# Altium PCB Crystal_Test_V1.PcbDoc
Units mm, origin at the board's own origin, x right, y up, seen from the top; angles counter-clockwise.
Board outline 40.4 x 45.06 mm, 2 copper layers (Top Layer, Bottom Layer), stack 0.695 mm thick; 20 components, 13 nets, 63 pads, 351 vias.
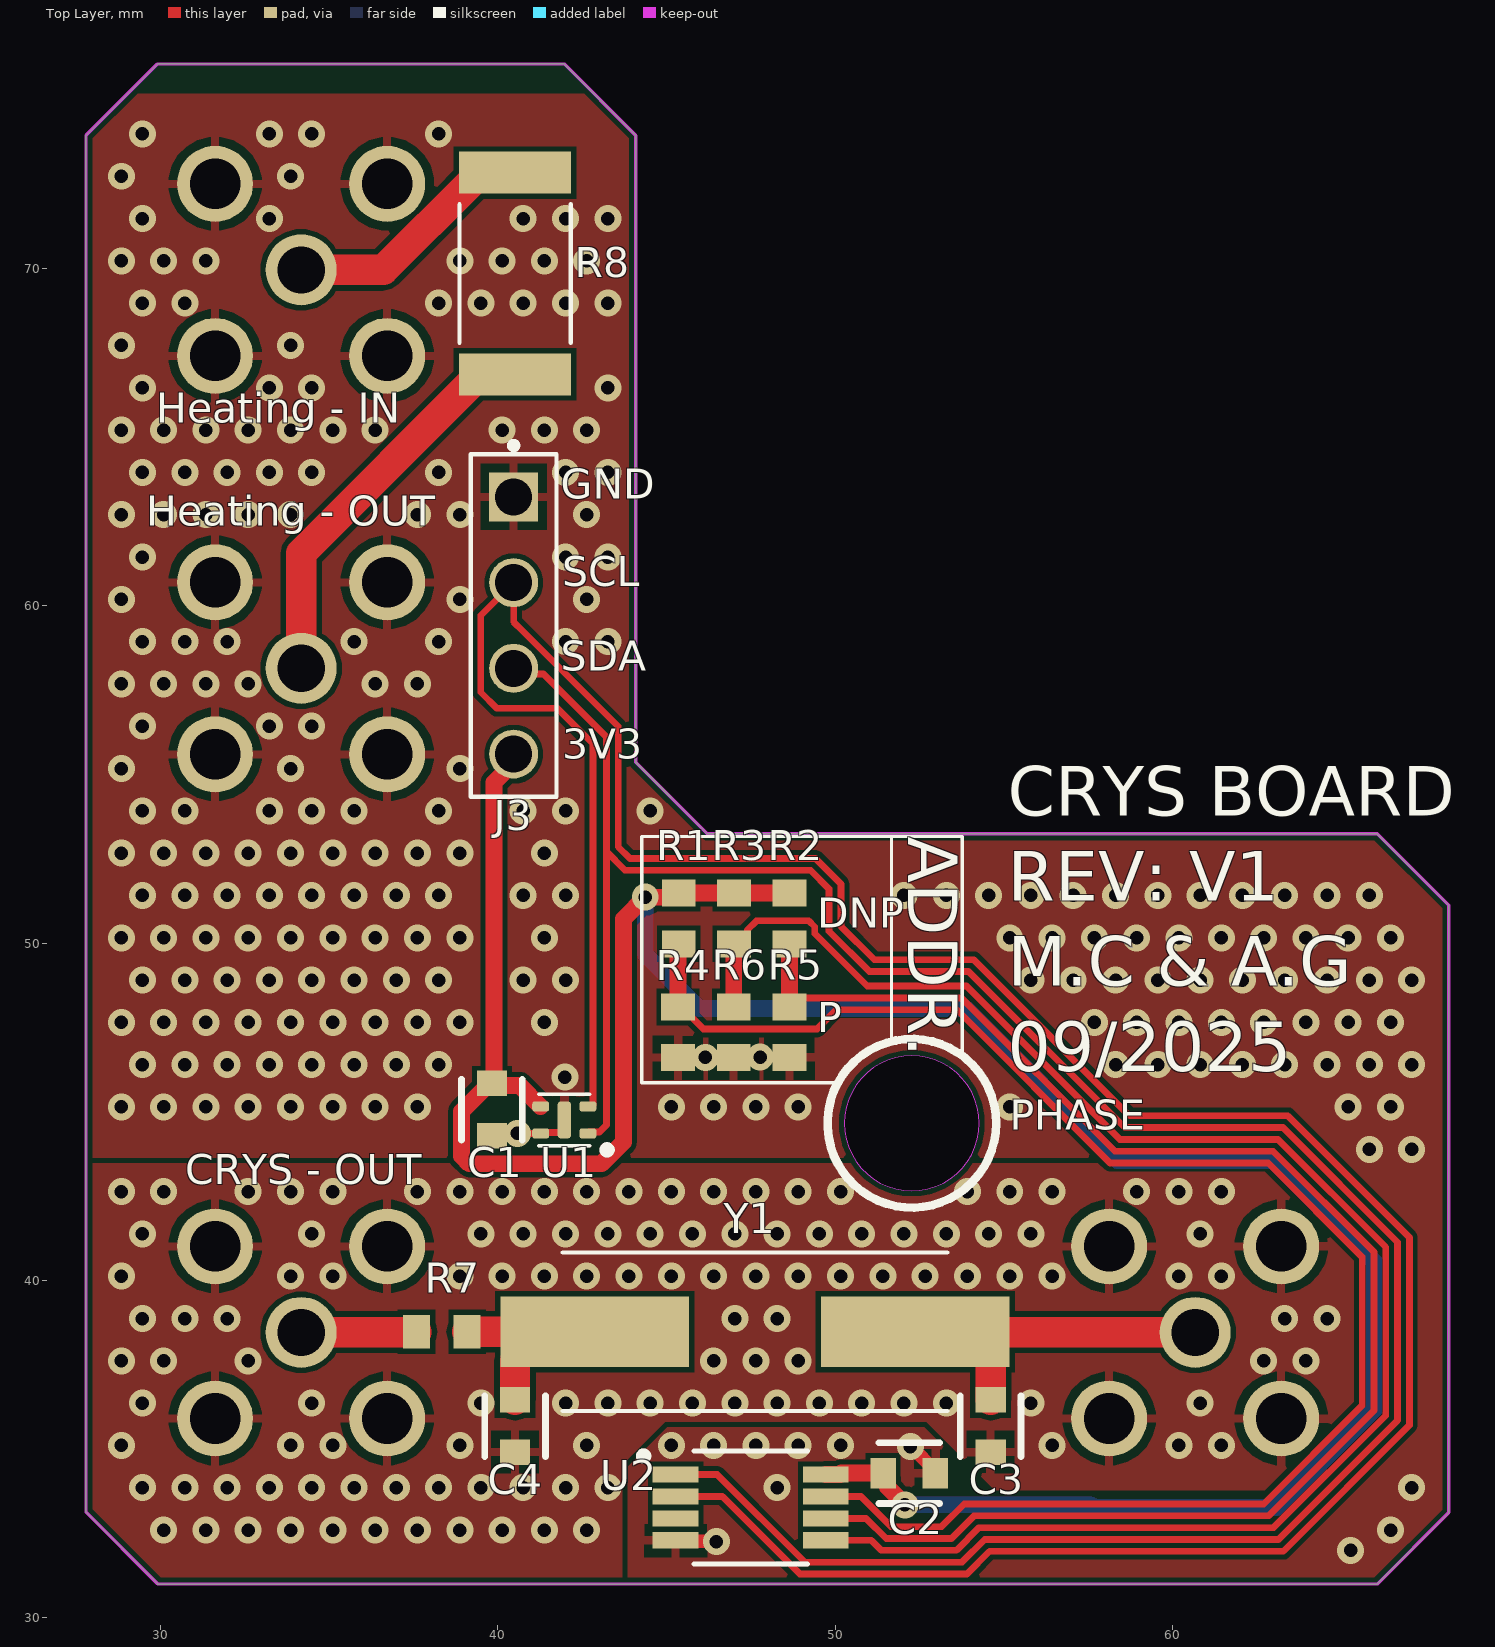
[diagram p0: Top Layer view]
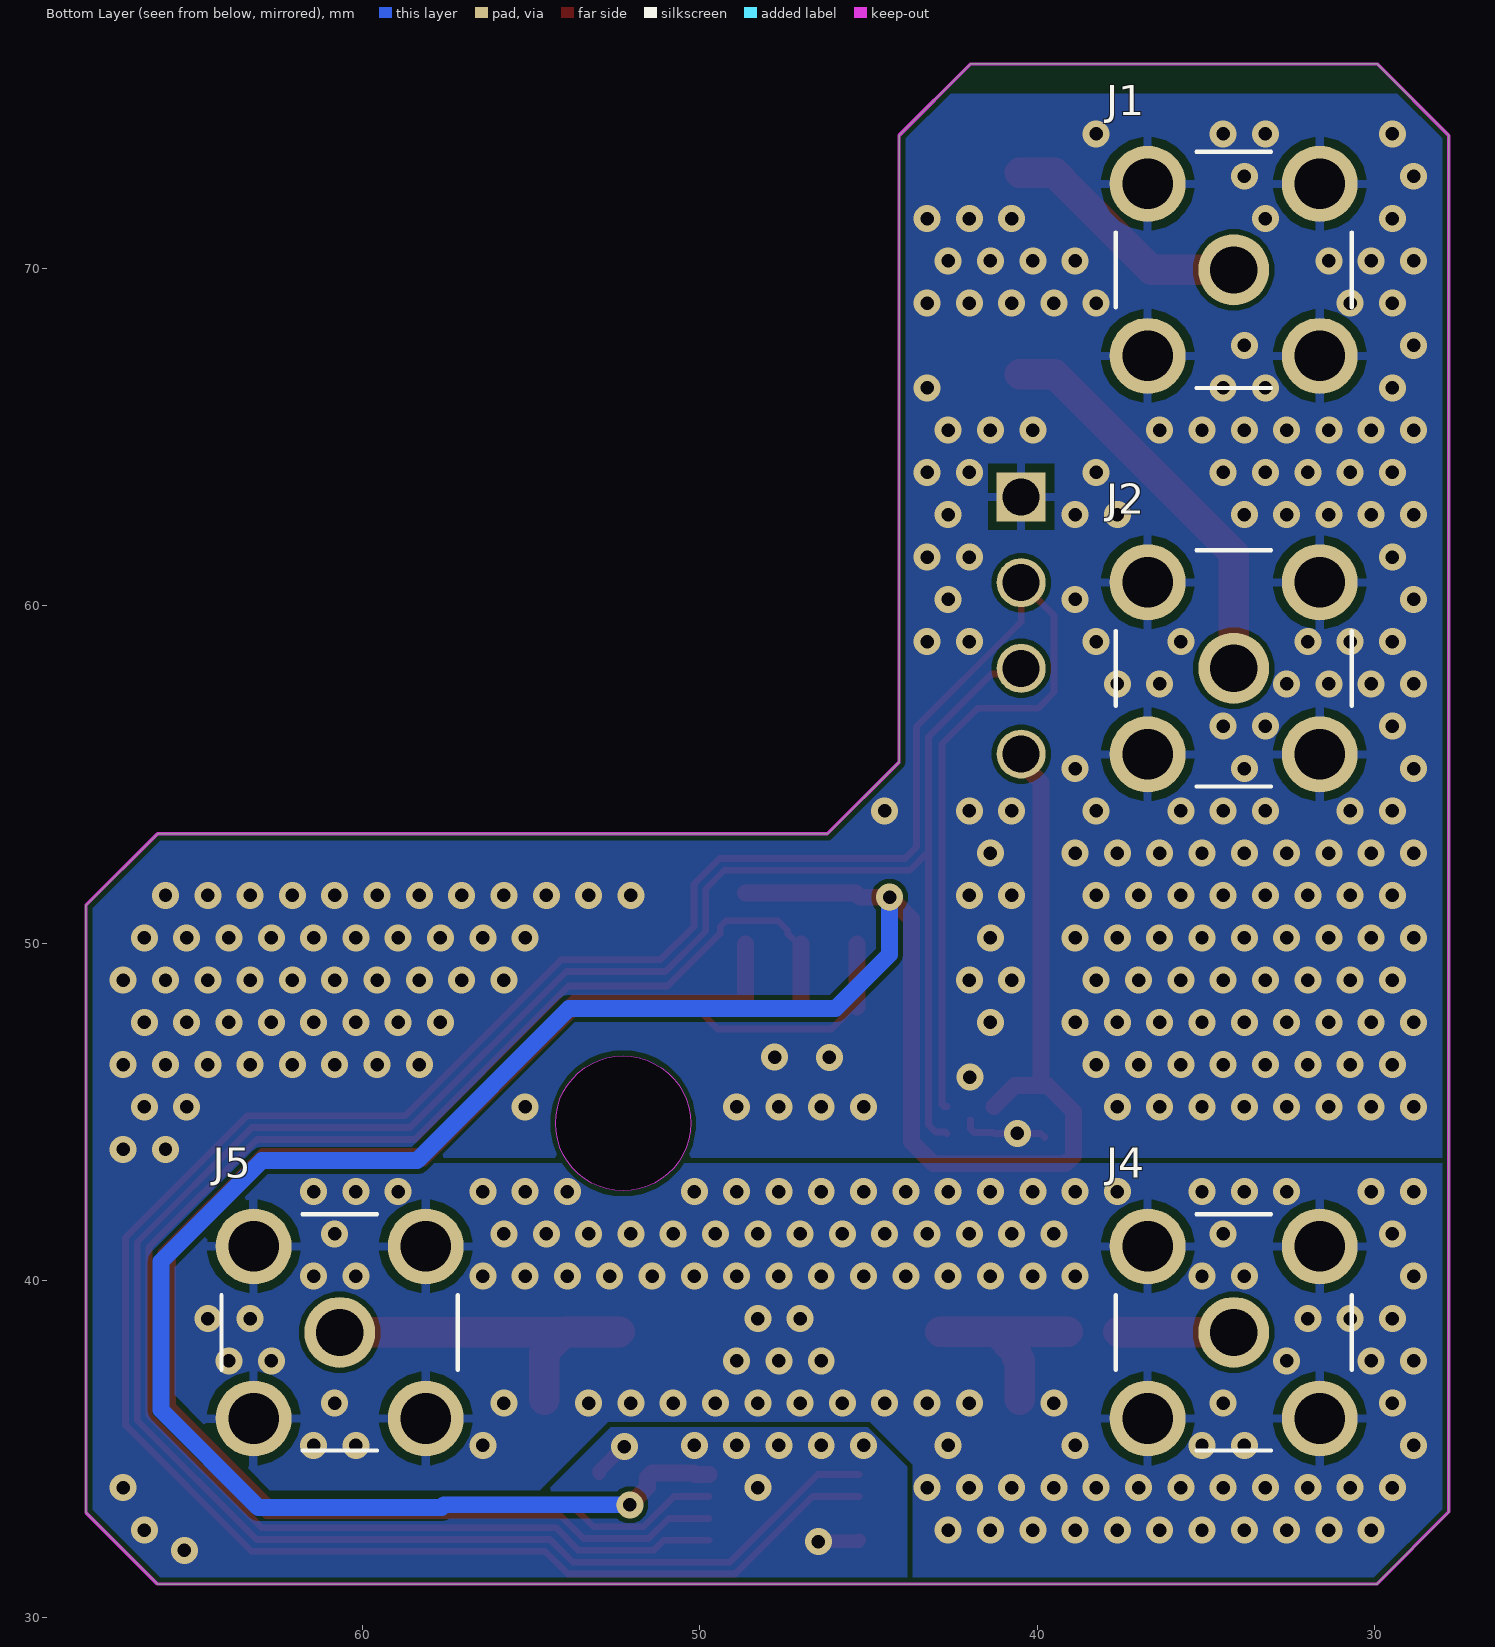
[diagram p1: Bottom Layer view, seen from below]
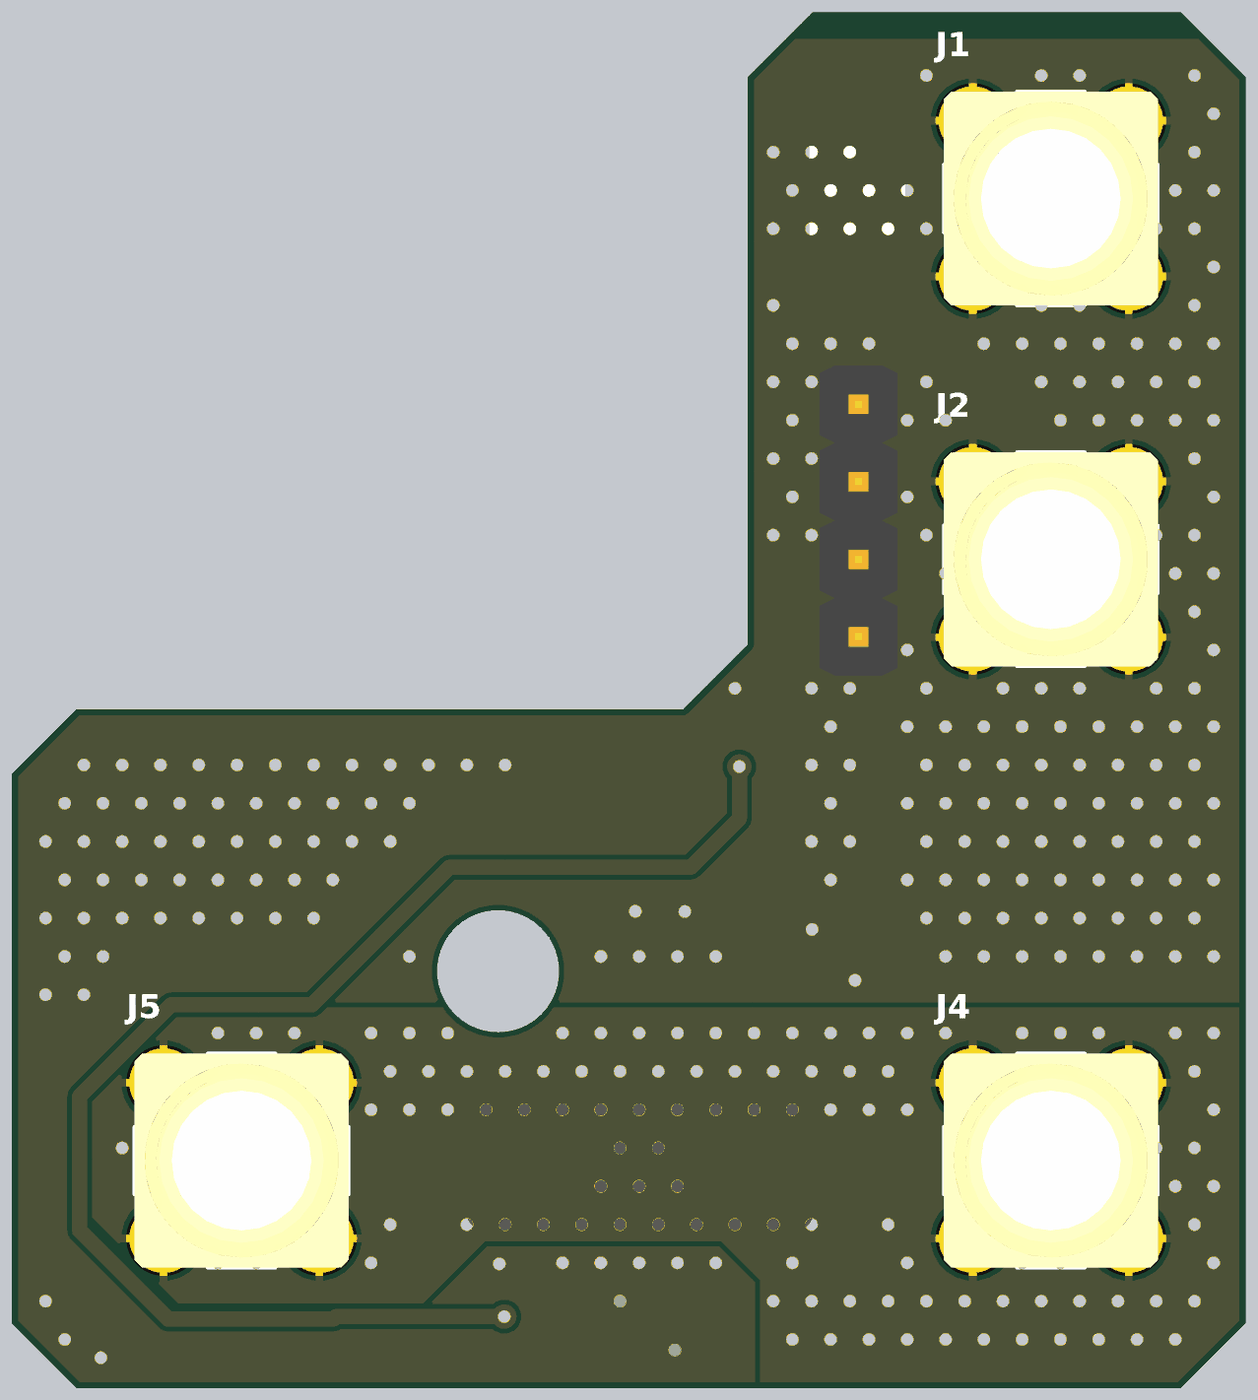
[diagram p2: 3D render of the assembled board from below, using the file's embedded part models]

## Layer stack, top to bottom
Top Solder: solder mask 0.0102, Solder Resist, Dk 3.5
Top Layer: signal copper 0.0152
Dielectric 1: dielectric 0.665, FR-4, Dk 4.8
Bottom Layer: signal copper 0.0152
Bottom Solder: solder mask 0.0102, Solder Resist, Dk 3.5

## Board outline
27.793,33.14 27.793,73.94 29.915,76.061 41.972,76.061 44.093,73.94 44.093,55.361 46.215,53.24 66.072,53.24 68.193,51.118 68.193,33.124 66.072,31.003 29.915,31.003 29.915,31.019
cut-out: 50.272,44.661 ccw(c52.272,44.661) 52.272,42.661 ccw(c52.272,44.661) 54.272,44.661 ccw(c52.272,44.661) 52.272,46.661 ccw(c52.272,44.661)

## Design rules (kind name [scope] priority, off if disabled: settings)
Clearance [All] p1: gap=0.15 ignorepadtopadclearanceinfootprint=FALSE
MinimumSolderMaskSliver [All] p1 off: minsoldermaskwidth=0.254
PolygonConnect [All] p1: thpad.connectstyle=Relief thpad.reliefconductorwidth=0.254 thpad.reliefentries=4 thpad.polygonreliefangle="90 Angle" thpad.airgapwidth=0.254 smdpad.connectstyle=Relief smdpad.reliefconductorwidth=0.254 smdpad.reliefentries=4 smdpad.polygonreliefangle="90 Angle" smdpad.airgapwidth=0.254 via.connectstyle=Direct via.reliefconductorwidth=0.254 via.reliefentries=4 via.polygonreliefangle="90 Angle" via.airgapwidth=0.254
RoutingVias [All] p1: holewidth=0.3 width=0.6 viastyle="Through Hole" minholewidth=0.2 minwidth=0.5 maxholewidth=0.711 maxwidth=1.27
SilkToSilkClearance [All] p1 off: silktosilkclearance=0.254
SilkToSolderMaskClearance [IsPad] p1 off: minsilkscreentomaskgap=0.254 clearancetoexposedcopper=TRUE
SolderMaskExpansion [All] p1: expansion=0.102 istentingtop=FALSE
SupplyNets "Schematic Supply Nets_1" [InNet('AGND')] p1: voltage=0.000
SupplyNets "Schematic Supply Nets_2" [InNet('GND')] p2: voltage=0.000
SupplyNets "Schematic Supply Nets" [InNet('3V3')] p3: voltage=0.000
Width [(InNet('MEMS_IN') OR InNet('MEMS_OUT') OR InNet('MEMS_IN_D_N') OR InNet('MEMS_IN_D_P') OR InNet('MEMS_OUT_D_N') OR InNet('MEMS_OUT_D_P'))] p1: maxlimit=1.154 minlimit=0.9 preferedwidth=1.154 impedanceprofiledriven=TRUE impedanceprofileid={71C03835-4AAD-4EFE-88B4-1C130F7F27B0} impedanceprofilevalue=50.000000 minimp=50.000000 maximp=50.000000 favimp=50.000000
Width Width_1 [All] p2: maxlimit=1 minlimit=0.1 preferedwidth=0.2
27 further rules are at their usual default settings.

## Components (designator, comment, footprint, x,y, rotation, side; value= is the part's Value field where it differs from the comment)
C1 "CL10E104KC8VPNC" C0603 39.829,45.068 r270 top value=100nF
C2 "CL10E104KC8VPNC" C0603 52.197,34.29 r0 top value=100nF
C3 "C0603C270J5GACTU" C0603 54.61,35.687 r270 top value=27pF
C4 "C0603C270J5GACTU" C0603 40.513,35.687 r270 top value=27pF
J1 "CONSMA001-G" CONSMA001-G 34.172,69.957 r180 bottom
J2 "CONSMA001-G" CONSMA001-G 34.172,58.146 r180 bottom
J3 "61300411121" WURTH_61300411121 40.472,59.416 r270 top
J4 "CONSMA001-G" CONSMA001-G 34.172,38.461 r180 bottom
J5 "CONSMA001-G" CONSMA001-G 60.672,38.461 r180 bottom
R1 "RMCF0603ZT0R00" R0603 45.364,50.732 r90 top value=0R
R2 "RMCF0603ZT0R00" R0603 48.645,50.732 r90 top value=0R
R3 "RMCF0603ZT0R00" R0603 47.005,50.732 r90 top value=0R
R4 "RMCF0603ZT0R00" R0603 45.343,47.357 r90 top value=0R
R5 "RMCF0603ZT0R00" R0603 48.645,47.357 r90 top value=0R
R6 "RMCF0603ZT0R00" R0603 46.994,47.357 r90 top value=0R
R7 "RMCF0603ZT0R00" R0603 38.342,38.481 r0 top value=0R
R8 "CRCW2512100RFKEG" R2512 40.513,69.85 r270 top value=100R
U1 "STS4L-AD1B-R3" STS4L-AD1B-R3 41.972,44.761 r180 top
U2 "P3T1755DPZ" TSSOP8_P3T1755DPZ_NXP 47.498,33.274 r0 top
Y1 "ABLS-18.000MHZ-B4-T" XTAL_ABLS-18.000MHZ-B4-T 47.625,38.481 r180 top value=18MHz

## Footprints (in the part's own frame and the unit in brackets; to place one, negate y for a bottom-side part, rotate by r counter-clockwise, add the part's x,y. Pads: shape width x height; smd on the part's side, far side on the other; paste and mask are expansions set on the pad)
C0603 [mm]
  rect 0.75x0.9 smd paste+0 mask+0: 1(-0.775,0) 2(0.775,0)
  silkscreen extent -0.9,-0.9 0.9,0.9, body extent -1.25,-0.6 1.25,0.6, height 0.25
CONSMA001-G [mm]
  round 2.1 hole 1.4: 1(0,0)
  round 2.25 hole 1.5: S1(-2.55,2.55) S2(-2.55,-2.55) S3(2.55,-2.55) S4(2.55,2.55)
  silkscreen extent -3.5,-3.5 3.5,3.5, body extent -3.51,-3.51 3.51,3.51, height 9.78
R0603 [mm]
  rect 0.8x1 smd: 1(-0.75,0) 2(0.75,0)
  body extent -0.85,-0.45 0.85,0.45, height 0.55
R2512 [mm]
  rect 1.24x3.32 smd: 1(-2.99,0) 2(2.99,0)
  silkscreen extent -2.05,-1.65 2.05,1.65, body extent -3.15,-1.58 3.15,1.58, height 0.7
STS4L-AD1B-R3 [mm]
  rrect50% 0.5x0.3 smd: 1(-0.7,0.4) 2(-0.7,-0.4) 3(0.7,-0.4) 4(0.7,0.4)
  rrect50% 0.4x1.1 smd: THERM(0,0)
  silkscreen extent -1.37,-0.76 0.76,0.99, body extent -0.75,-0.75 0.75,0.75, height 0.55
TSSOP8_P3T1755DPZ_NXP [mm]
  rect 1.356x0.483 smd paste+0 mask+0: 1(-2.228,0.975) 2(-2.228,0.325) 3(-2.228,-0.325) 4(-2.228,-0.975) 5(2.228,-0.975) 6(2.228,-0.325) 7(2.228,0.325) 8(2.228,0.975)
  silkscreen extent -3.27,-1.68 1.68,1.68, body extent -2.55,-1.55 2.55,1.55, height 1.09
WURTH_61300411121 [mm]
  rect 1.45x1.45 / inner round 1.45 / far side rect 1.45x1.45 hole 1.1: 1(-3.81,0)
  round 1.45 hole 1.1: 2(-1.27,0) 3(1.27,0) 4(3.81,0)
  silkscreen extent -5.43,-1.27 5.08,1.27, body extent -5.08,-1.27 5.08,1.27, height 7.27
XTAL_ABLS-18.000MHZ-B4-T [mm]
  rect 5.6x2.1 smd: 1(-4.75,0) 2(4.75,0)
  silkscreen extent -5.7,-2.35 5.7,2.35, body extent -6.35,-2.35 6.35,2.35, height 4.2

## Part data
C1 C2: "CAP CER 100NF 100V X8L 0603", Case=0603, Manufacturer=Samsung, Supplier Part Number=1276-CL10E104KC8VPNCCT-ND, Supplier Part Number 1=187-CL10E104KC8VPNC, Manufacturer Part Number=CL10E104KC8VPNC, Pricing="1=0.27, 10=0.155, 50=0.1104, 100=0.0966, 500=0.07306, 1000=0.06573 (USD)", RoHS=No, Stock=47712, Supplier=Digikey, Supplier 1=Mouser
C3 C4: "CAP CER 27PF 50V C0G/NP0 0603", Supplier Part Number 1=53M7200, Packaging=0603, Supplier 1=Newark
J1 J2 J4 J5: "CONN SMA RCPT STR 50 OHM PCB"
J3: "CONN HEADER VERT 4POS 2.54MM", Package=None, Supplier Part Number 1=20X0951, Check_prices=https://www.snapeda.com/parts/61300411121/W%25C3%25BCrth+Elektronik+Midcom/view-part/?ref=eda, MF="WÃ¼rth Elektronik", MP=61300411121, SnapEDA_Link=https://www.snapeda.com/parts/61300411121/W%25C3%25BCrth+Elektronik+Midcom/view-part/?ref=snap, Supplier 1=Newark
R1 R2 R3 R4 R5 R6 R7: "RES 0 OHM JUMPER 1/10W 0603", Package=0603, Supplier Part Number 1=RMCF0603ZT0R00CT-ND, Check_prices=https://www.snapeda.com/parts/RMCF0603ZT0R00/Stackpole+Electronics+Inc/view-part/?ref=eda, MF="Stackpole Electronics", MP=RMCF0603ZT0R00, SnapEDA_Link=https://www.snapeda.com/parts/RMCF0603ZT0R00/Stackpole+Electronics+Inc/view-part/?ref=snap, Supplier 1=DigiKey
R8: "RES SMD 100 OHM 1% 1W 2512", Packaging=2512
U1: "IC - TEMPERATURE SENSOR 4-DFN", Supplier Part Number 1=1649-STS4L-AD1B-R3CT-ND, Supplier 1=DigiKey
U2: "SENSOR DGTL -40C ~ 125C 8-TSSOP", Supplier Part Number 1=568-P3T1755DPZCT-ND, Supplier 1=DigiKey
Y1: "CRYSTAL 18.0000MHZ 18PF SMD", Capacitance=18pF, Package="HC-49/US Abracon LLC", Supplier Part Number 1=535-10229-1-ND, Check_prices=https://www.snapeda.com/parts/ABLS-18.000MHZ-B4-T/Abracon/view-part/?ref=eda, MF=Abracon, MP=ABLS-18.000MHZ-B4-T, SnapEDA_Link=https://www.snapeda.com/parts/ABLS-18.000MHZ-B4-T/Abracon/view-part/?ref=snap, Supplier 1=DigiKey

## Via types
v1: diameter 0.8, hole 0.4, Top Layer to Bottom Layer, tented both sides, 351 vias

## Nets (pads, with @x,y where several pads share a name; then routed paths per layer and width w, separated by ;. In a path a pad name is that pad's centre, name@x,y a point inside that pad or via, vN(x,y) a via of type N, cw(c..) or ccw(c..) an arc to the next point about the centre after c; other vN are vias at no path point)
3V3: C1.1 C2.1 J3.4 R1.2 R2.2 R3.2 U1.3 U2.8 | length 80.9
  Top Layer w0.5: J3.4 40.472,55.349 39.886,54.763 39.886,45.9 C1.1 C1.1@39.772,45.786 ; U1.3 40.652,45.781 39.777,45.781 C1.1@39.772,45.786 ; R2.2 R3.2 R1.2 45.243,51.361 v1(44.372,51.361) 43.722,50.711 43.722,44.111 43.072,43.461 41.041,43.461 39.156,43.461 38.922,43.695 38.922,45.011 39.697,45.786 C1.1@39.772,45.786 ; U2.8 50.145,34.249 50.186,34.29 C2.1 51.547,34.165 51.547,33.876 v1(52.07,33.353)
  Bottom Layer w0.5: v1(44.372,51.361) 44.372,49.661 45.972,48.061 53.872,48.061 58.372,43.561 62.972,43.561 65.972,40.561 65.972,36.161 63.085,33.274 57.658,33.274 57.579,33.353 v1(52.07,33.353)
AGND: C3.2 C4.2 J4.S1 J4.S2 J4.S3 J4.S4 J5.S1 J5.S2 J5.S3 J5.S4
  other v1: 30.096,32.604 31.35,32.604 32.604,32.604 33.858,32.604 35.112,32.604 36.366,32.604 37.62,32.604 38.874,32.604 40.128,32.604 41.382,32.604 42.636,32.604 29.469,33.858 30.723,33.858 31.977,33.858 33.231,33.858 34.485,33.858 35.739,33.858 36.993,33.858 38.247,33.858 39.501,33.858 40.755,33.858 42.009,33.858 43.263,33.858 28.842,35.112 33.858,35.112 35.112,35.112 38.874,35.112 42.636,35.112 56.43,35.112 60.192,35.112 61.446,35.112 29.469,36.366 34.485,36.366 39.501,36.366 42.009,36.366 43.263,36.366 44.517,36.366 45.771,36.366 47.025,36.366 48.279,36.366 49.533,36.366 50.787,36.366 52.041,36.366 53.295,36.366 55.803,36.366 60.819,36.366 28.842,37.62 30.096,37.62 32.604,37.62 46.398,37.62 47.652,37.62 48.906,37.62 62.7,37.62 63.954,37.62 29.469,38.874 30.723,38.874 31.977,38.874 47.025,38.874 48.279,38.874 63.327,38.874 64.581,38.874 28.842,40.128 33.858,40.128 35.112,40.128 38.874,40.128 40.128,40.128 41.382,40.128 42.636,40.128 43.89,40.128 45.144,40.128 46.398,40.128 47.652,40.128 48.906,40.128 50.16,40.128 51.414,40.128 52.668,40.128 53.922,40.128 55.176,40.128 56.43,40.128 60.192,40.128 61.446,40.128 29.469,41.382 34.485,41.382 39.501,41.382 40.755,41.382 42.009,41.382 43.263,41.382 44.517,41.382 45.771,41.382 47.025,41.382 48.279,41.382 49.533,41.382 50.787,41.382 52.041,41.382 53.295,41.382 54.549,41.382 55.803,41.382 60.819,41.382 28.842,42.636 30.096,42.636 32.604,42.636 33.858,42.636 35.112,42.636 37.62,42.636 38.874,42.636 40.128,42.636 41.382,42.636 42.636,42.636 43.89,42.636 45.144,42.636 46.398,42.636 47.652,42.636 48.906,42.636 50.16,42.636 53.922,42.636 55.176,42.636 56.43,42.636 58.938,42.636 60.192,42.636 61.446,42.636
C_B_R: C4.1 R7.2 Y1.2 | length 7.8
  Top Layer w0.9: R7.2 Y1.2 41.212,38.481 40.612,37.881 40.612,37.732 40.513,37.634 C4.1
CRYSTAL_IN: C3.1 J5.1 Y1.1 | length 12.2
  Top Layer w0.9: C3.1 54.61,37.881 54.01,38.481 Y1.1 52.385,38.471 J5.1@60.662,38.471
CRYSTAL_OUT: J4.1 R7.1 | length 3.4
  Top Layer w0.9: J4.1 34.182,38.471 37.582,38.471 R7.1
GND: C1.2 C2.2 J1.S1 J1.S2 J1.S3 J1.S4 J2.S1 J2.S2 J2.S3 J2.S4 J3.1 R4.1 R5.1 R6.1 U1.4 U1.THERM U2.4 | length 4.9
  Top Layer w0.2: C1.2@39.772,44.236 39.897,44.361 U1.4 41.297,44.386 41.872,44.386 41.972,44.486 U1.THERM
  Top Layer w0.4: U2.4 45.291,32.279 46.461,32.279 v1(46.482,32.258) ; v1(52.231,35.078) 52.259,35.078 52.972,34.365 C2.2
  other v1: 65.278,32.004 66.462,32.604 48.279,33.858 67.089,33.858 45.144,35.112 46.398,35.112 47.652,35.112 48.906,35.112 50.16,35.112 65.835,43.89 67.089,43.89 40.584,44.361 28.842,45.144 30.096,45.144 31.35,45.144 32.604,45.144 33.858,45.144 35.112,45.144 36.366,45.144 37.62,45.144 45.144,45.144 46.398,45.144 47.652,45.144 48.906,45.144 55.176,45.144 65.208,45.144 66.462,45.144 41.991,46.028 29.469,46.398 30.723,46.398 31.977,46.398 33.231,46.398 34.485,46.398 35.739,46.398 36.993,46.398 38.247,46.398 58.311,46.398 59.565,46.398 60.819,46.398 62.073,46.398 63.327,46.398 64.581,46.398 65.835,46.398 67.089,46.398 46.157,46.614 47.778,46.621 28.842,47.652 30.096,47.652 31.35,47.652 32.604,47.652 33.858,47.652 35.112,47.652 36.366,47.652 37.62,47.652 38.874,47.652 41.382,47.652 57.684,47.652 58.938,47.652 60.192,47.652 61.446,47.652 62.7,47.652 63.954,47.652 65.208,47.652 66.462,47.652 29.469,48.906 30.723,48.906 31.977,48.906 33.231,48.906 34.485,48.906 35.739,48.906 36.993,48.906 38.247,48.906 40.755,48.906 42.009,48.906 55.803,48.906 57.057,48.906 58.311,48.906 59.565,48.906 60.819,48.906 62.073,48.906 63.327,48.906 64.581,48.906 65.835,48.906 67.089,48.906 28.842,50.16 30.096,50.16 31.35,50.16 32.604,50.16 33.858,50.16 35.112,50.16 36.366,50.16 37.62,50.16 38.874,50.16 41.382,50.16 55.176,50.16 56.43,50.16 57.684,50.16 58.938,50.16 60.192,50.16 61.446,50.16 62.7,50.16 63.954,50.16 65.208,50.16 66.462,50.16 29.469,51.414 30.723,51.414 31.977,51.414 33.231,51.414 34.485,51.414 35.739,51.414 36.993,51.414 38.247,51.414 40.755,51.414 42.009,51.414 52.041,51.414 53.295,51.414 54.549,51.414 55.803,51.414 57.057,51.414 58.311,51.414 59.565,51.414 60.819,51.414 62.073,51.414 63.327,51.414 64.581,51.414 65.835,51.414 28.842,52.668 30.096,52.668 31.35,52.668 32.604,52.668 33.858,52.668 35.112,52.668 36.366,52.668 37.62,52.668 38.874,52.668 41.382,52.668 29.469,53.922 30.723,53.922 33.231,53.922 34.485,53.922 35.739,53.922 38.247,53.922 40.755,53.922 42.009,53.922 44.517,53.922 28.842,55.176 33.858,55.176 38.874,55.176 29.469,56.43 33.231,56.43 34.485,56.43 28.842,57.684 30.096,57.684 31.35,57.684 32.604,57.684 36.366,57.684 37.62,57.684 29.469,58.938 30.723,58.938 31.977,58.938 35.739,58.938 38.247,58.938 42.009,58.938 43.263,58.938 28.842,60.192 38.874,60.192 42.636,60.192 29.469,61.446 42.009,61.446 43.263,61.446 28.842,62.7 30.096,62.7 31.35,62.7 32.604,62.7 33.858,62.7 37.62,62.7 38.874,62.7 42.636,62.7 29.469,63.954 30.723,63.954 31.977,63.954 33.231,63.954 34.485,63.954 38.247,63.954 42.009,63.954 43.263,63.954 28.842,65.208 30.096,65.208 31.35,65.208 32.604,65.208 33.858,65.208 35.112,65.208 36.366,65.208 40.128,65.208 41.382,65.208 42.636,65.208 29.469,66.462 33.231,66.462 34.485,66.462 43.263,66.462 28.842,67.716 33.858,67.716 29.469,68.97 30.723,68.97 38.247,68.97 39.501,68.97 40.755,68.97 42.009,68.97 43.263,68.97 28.842,70.224 30.096,70.224 31.35,70.224 38.874,70.224 40.128,70.224 41.382,70.224 42.636,70.224 29.469,71.478 33.231,71.478 40.755,71.478 42.009,71.478 43.263,71.478 28.842,72.732 33.858,72.732 29.469,73.986 33.231,73.986 34.485,73.986 38.247,73.986
HEATING_IN: J1.1 R8.1 | length 7.5
  Top Layer w0.9: J1.1 36.611,69.957 39.303,72.649 39.303,72.67 39.473,72.84 R8.1
HEATING_OUT: J2.1 R8.2 | length 11.9
  Top Layer w0.9: J2.1 34.172,61.559 39.473,66.86 R8.2
NetR1_1: R1.1 R4.2 U2.7 | length 47.9
  Top Layer w0.2: R4.2 45.443,48.107 46.093,47.457 49.468,47.457 50.039,48.028 53.605,48.028 58.15,43.483 62.838,43.483 65.622,40.699 65.622,36.292 62.705,33.374 53.828,33.374 53.157,32.703 51.659,32.703 50.763,33.599 U2.7
  Top Layer w0.5: R4.2 R1.1@45.343,49.982
NetR2_1: R2.1 R5.2 U2.6 | length 45.2
  Top Layer w0.2: R5.2 48.916,48.378 53.75,48.378 58.295,43.833 62.983,43.833 65.972,40.844 65.972,36.147 62.85,33.024 54.119,33.024 53.448,32.353 51.514,32.353 50.918,32.949 U2.6
  Top Layer w0.5: R5.2 R2.1
NetR3_1: R3.1 R6.2 U2.5 | length 49
  Top Layer w0.2: R3.1@46.994,49.982 47.094,49.982 47.394,50.282 47.394,50.382 47.673,50.661 49.22,50.661 49.395,50.486 49.395,50.286 50.953,48.728 53.895,48.728 58.44,44.183 63.128,44.183 66.322,40.989 66.322,36.002 62.995,32.674 54.264,32.674 53.593,32.003 51.369,32.003 51.073,32.299 U2.5
  Top Layer w0.5: R6.2 R3.1@46.994,49.982
SCL: J3.2 U1.2 U2.2 | length 86.7
  Top Layer w0.2: U1.2 42.772,45.161 42.822,45.211 42.822,55.911 41.772,56.961 39.972,56.961 39.497,57.436 39.497,59.711 J3.2 40.472,59.525 40.736,59.261 43.572,56.425 43.572,52.856 43.917,52.511 49.417,52.511 50.172,51.756 50.172,50.499 51.16,49.511 54.102,49.511 58.73,44.883 63.418,44.883 67.022,41.279 67.022,35.712 63.285,31.974 54.58,31.974 53.909,31.303 48.954,31.303 46.658,33.599 U2.2
SDA: J3.3 U1.1 U2.1 | length 74.2
  Top Layer w0.2: J3.3 40.639,57.979 41.354,57.979 43.222,56.111 43.222,52.711 ; U1.1 42.712,44.401 43.012,44.401 43.222,44.611 43.222,52.711 ; U2.1 46.503,34.249 49.099,31.653 53.764,31.653 54.435,32.324 63.14,32.324 66.672,35.857 66.672,41.134 63.273,44.533 58.585,44.533 53.957,49.161 51.015,49.161 49.822,50.354 49.822,51.611 49.272,52.161 43.772,52.161 43.222,52.711
pads on no net: U2.3

## Polygon pours and split planes (outlines as drawn)
AGND on Bottom Layer "NONET_L-01_P-001" (solid, remove dead copper, pour order 0): 26.543,42.418 26.543,32.893 28.956,30.48 43.434,30.48 43.688,30.734 43.688,34.544 44.958,35.814 52.705,35.814 54.737,33.782 62.738,33.782 65.622,36.666 65.622,40.699 62.838,43.483 27.608,43.483
GND on Bottom Layer "GND_L02_P002" (solid, remove dead copper, pour order 2): 20.043,75.184 90.043,75.184 90.043,25.184 20.043,25.184
AGND on Top Layer "NONET_L-01_P-001" (solid, remove dead copper, pour order 1): 26.543,42.418 26.543,32.893 28.956,30.48 43.434,30.48 43.688,30.734 43.688,34.544 44.958,35.814 52.705,35.814 54.737,33.782 62.738,33.782 65.622,36.666 65.622,40.699 62.838,43.483 27.608,43.483
GND on Top Layer "GND_L01_P003" (solid, remove dead copper, pour order 3): 20.043,75.184 90.043,75.184 90.043,25.184 20.043,25.184

## Keep-outs
Keep-Out Layer:
  lines w0.1: 29.915,31.003 66.072,31.003 68.193,33.124 68.193,51.118 66.072,53.24 46.215,53.24 44.093,55.361 44.093,73.94 41.972,76.061 29.915,76.061 27.793,73.94 27.793,33.14 29.915,31.019

## Silkscreen, mask and mechanical layers (free items; w line width, h text height)
Top Overlay:
  circle w0.254: c52.272,44.661 r2.5
  lines w0.1: 50.072,45.861 44.272,45.861 44.272,53.161 51.672,53.161 ; 51.672,47.061 51.672,53.161 ; 53.772,46.661 53.772,53.161 51.672,53.161
  text "Heating - IN" at 29.872,65.128 h1.52
  text "GND" at 41.872,62.876 h1.52
  text "Heating - OUT" at 29.58,62.08 h1.52
  text "SCL" at 41.911,60.276 h1.52
  text "SDA" at 41.873,57.776 h1.52
  text "3V3" at 41.918,55.174 h1.52
  text "ADDR." at 51.672,53.161 h2.52 r270
  text "DNP" at 49.472,50.161 h1.52
  text "P" at 49.472,47.061 h1.52
  text "CRYS BOARD / REV: V1 / M.C & A.G / 09/2025" at 55.118,45.72 h2.52
  text "PHASE" at 55.172,44.175 h1.52
  text "CRYS - OUT" at 30.734,42.56 h1.52
Mechanical 1:
  circle w0.254: c52.272,44.661 r2
  lines w0.1: 34.172,38.461 34.172,58.146 34.172,69.957 ; 44.703,38.971 50.703,38.971 ; 44.703,35.971 50.703,35.971 50.703,41.971 44.703,41.971 44.703,35.971 ; 45.445,36.727 49.945,36.727 49.945,41.227 45.445,41.227 45.445,36.727
  lines w0.254: 34.172,38.461 60.672,38.461